# Altium PCB gen2.PcbDoc
Units mil, origin at the board's own origin, x right, y up, seen from the top; angles counter-clockwise.
Board outline 1377.95 x 1574.8 mil, 2 copper layers (Top Layer, Bottom Layer); 49 components, 41 nets, 242 pads, 74 vias.
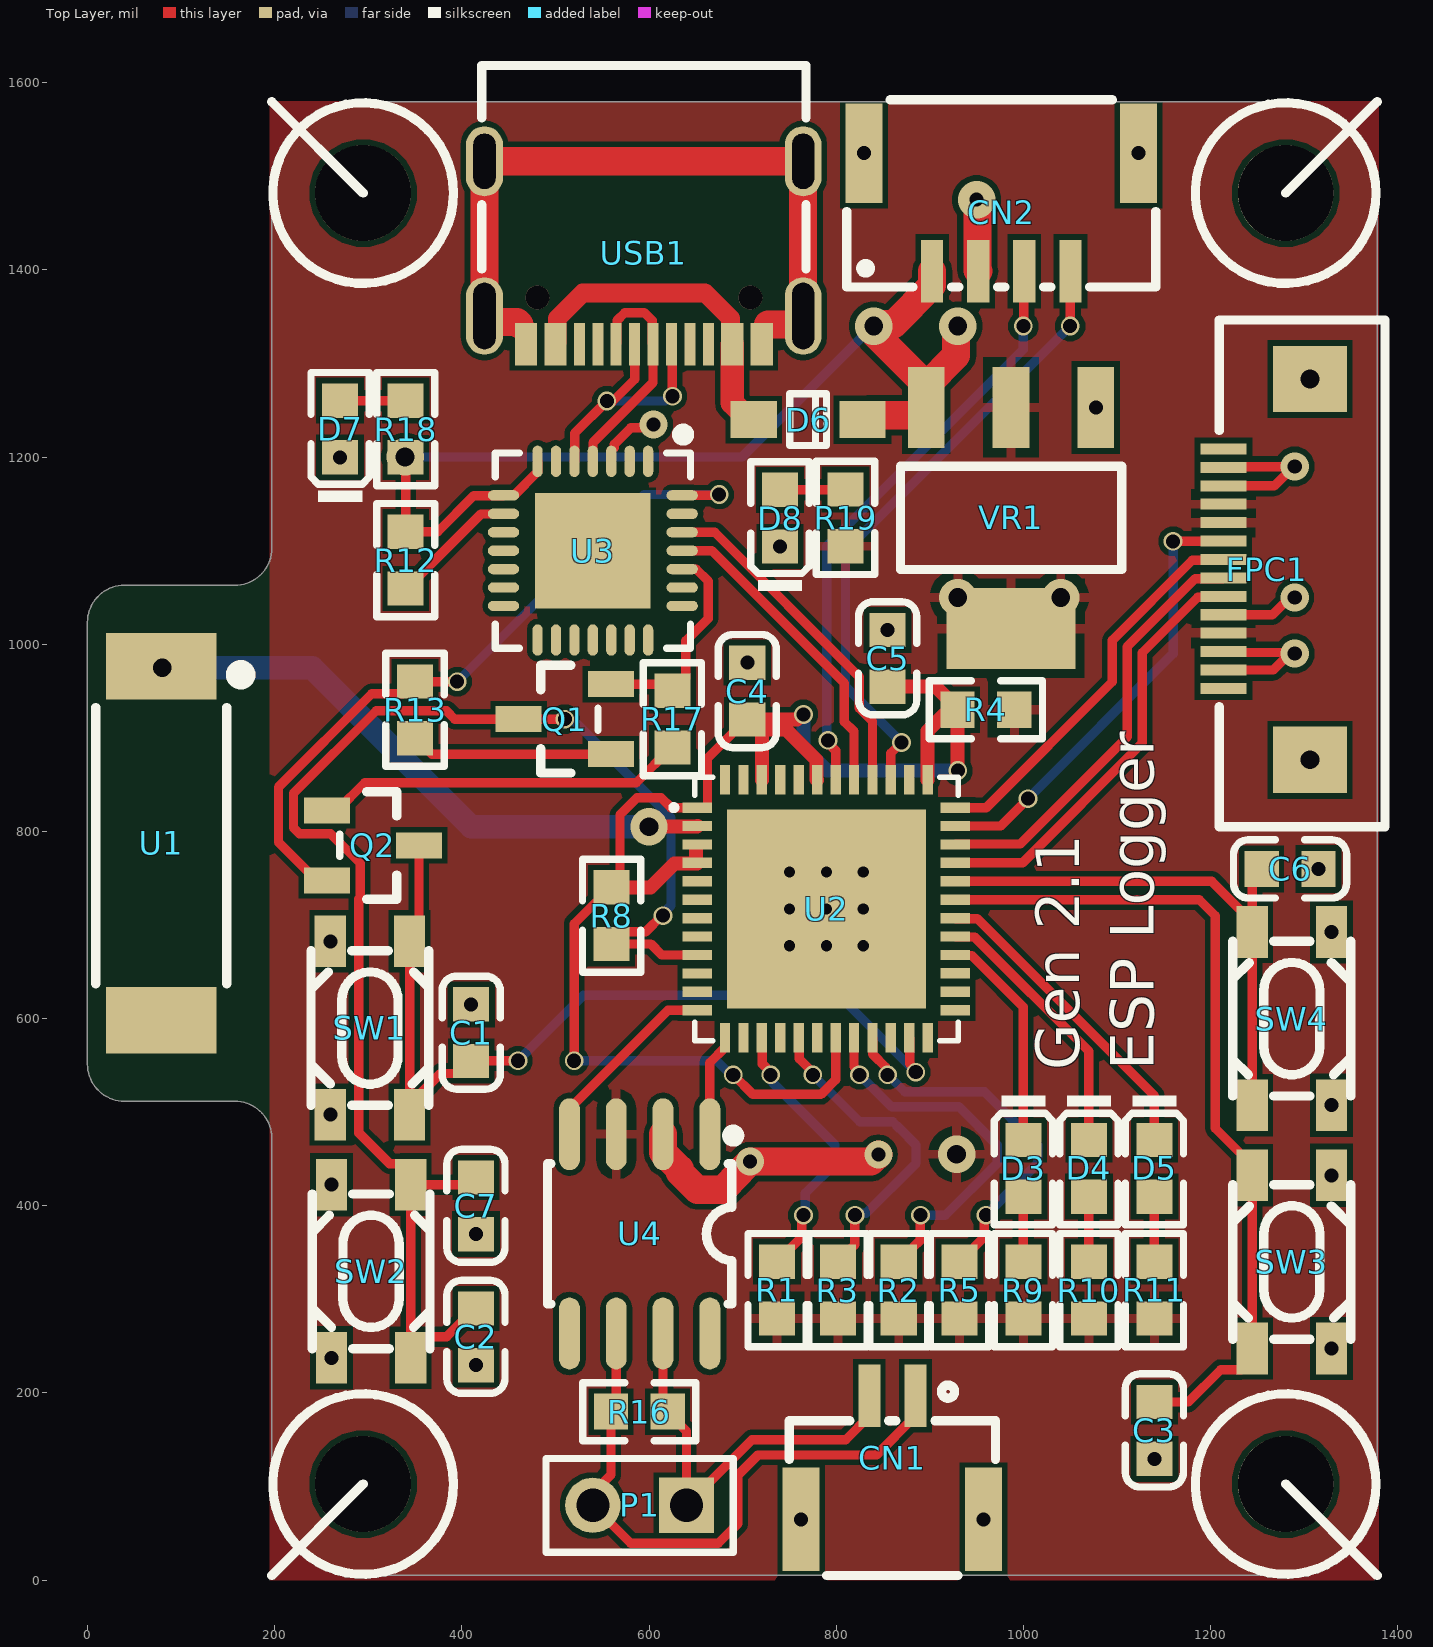
[diagram p0: Top Layer view]
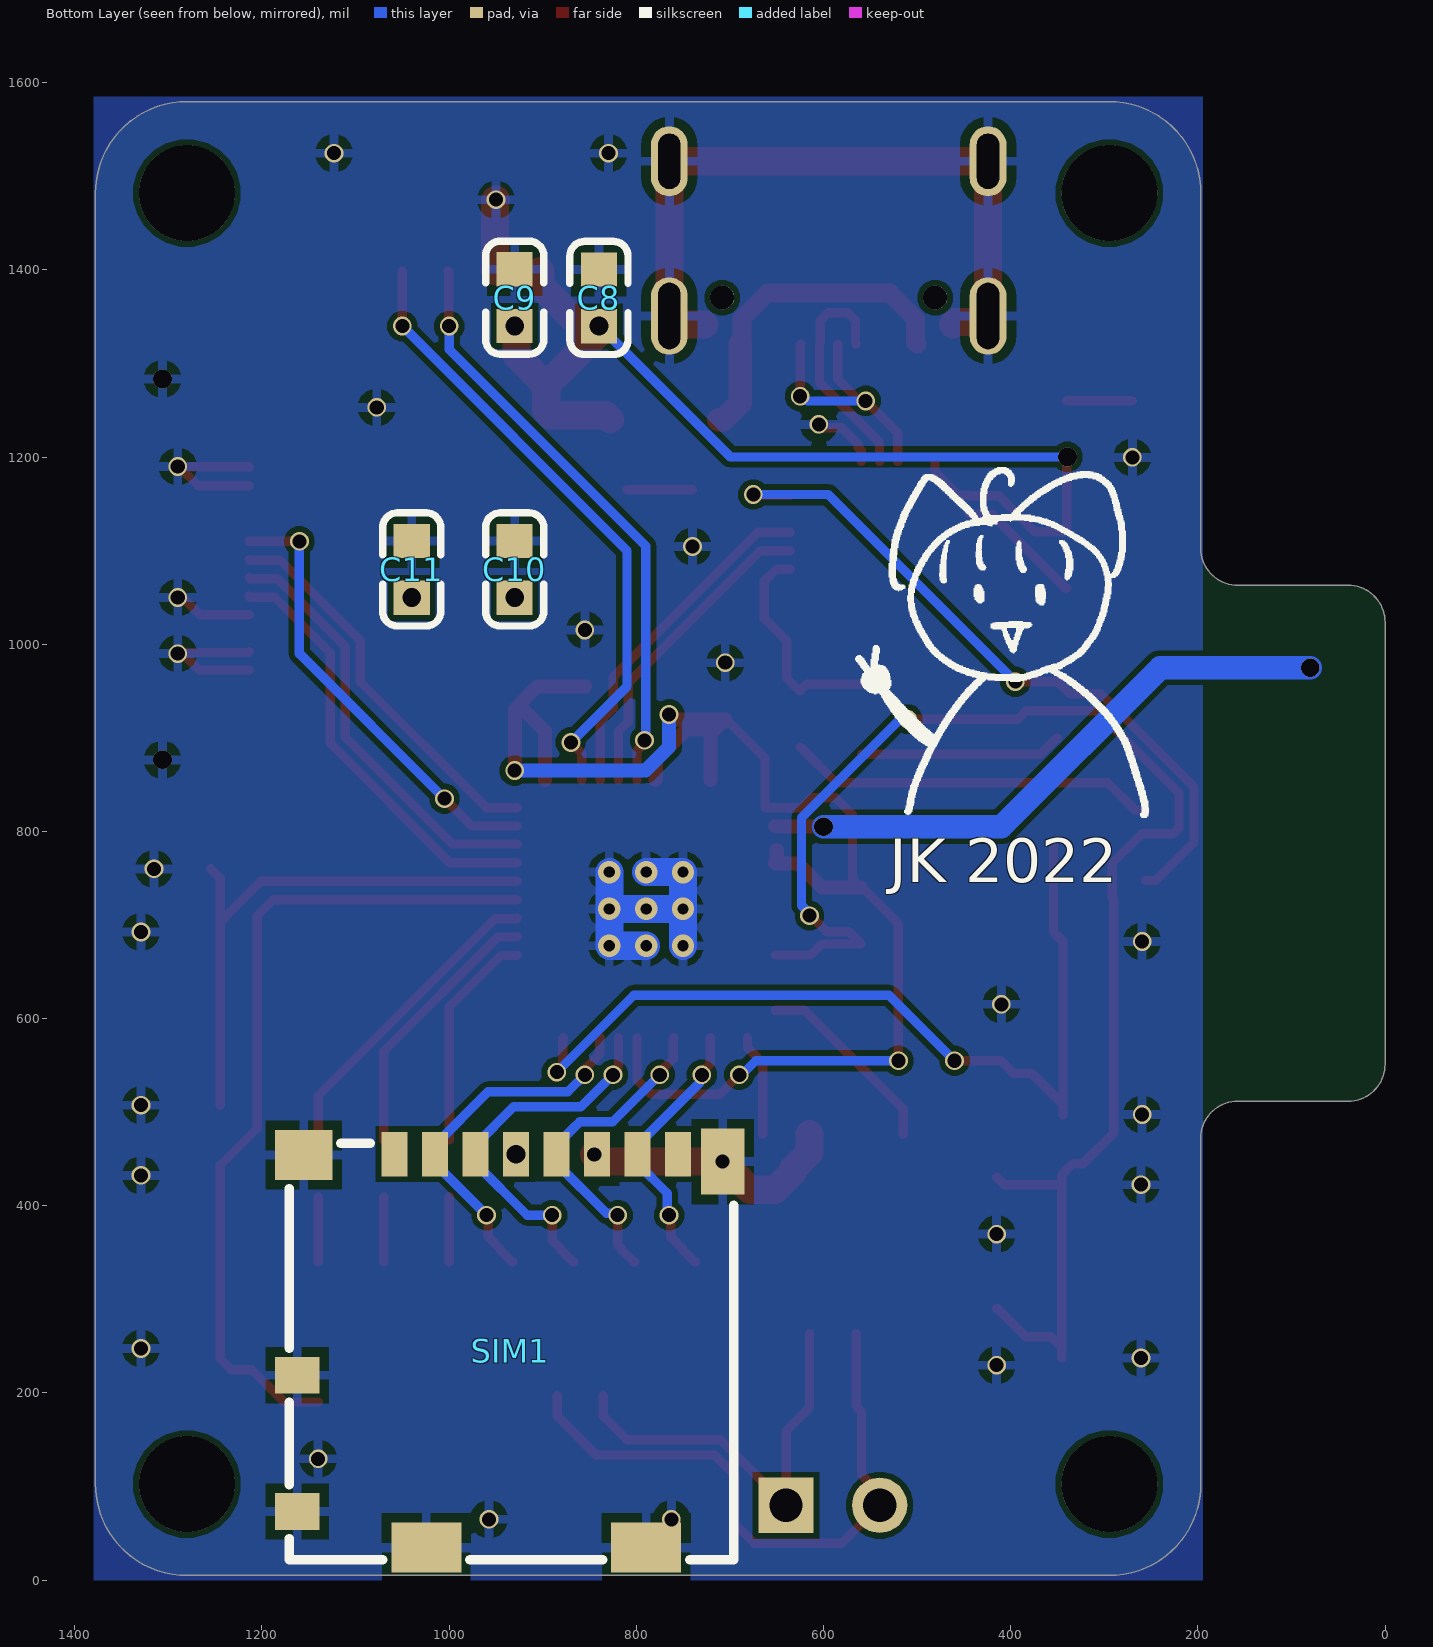
[diagram p1: Bottom Layer view, seen from below]
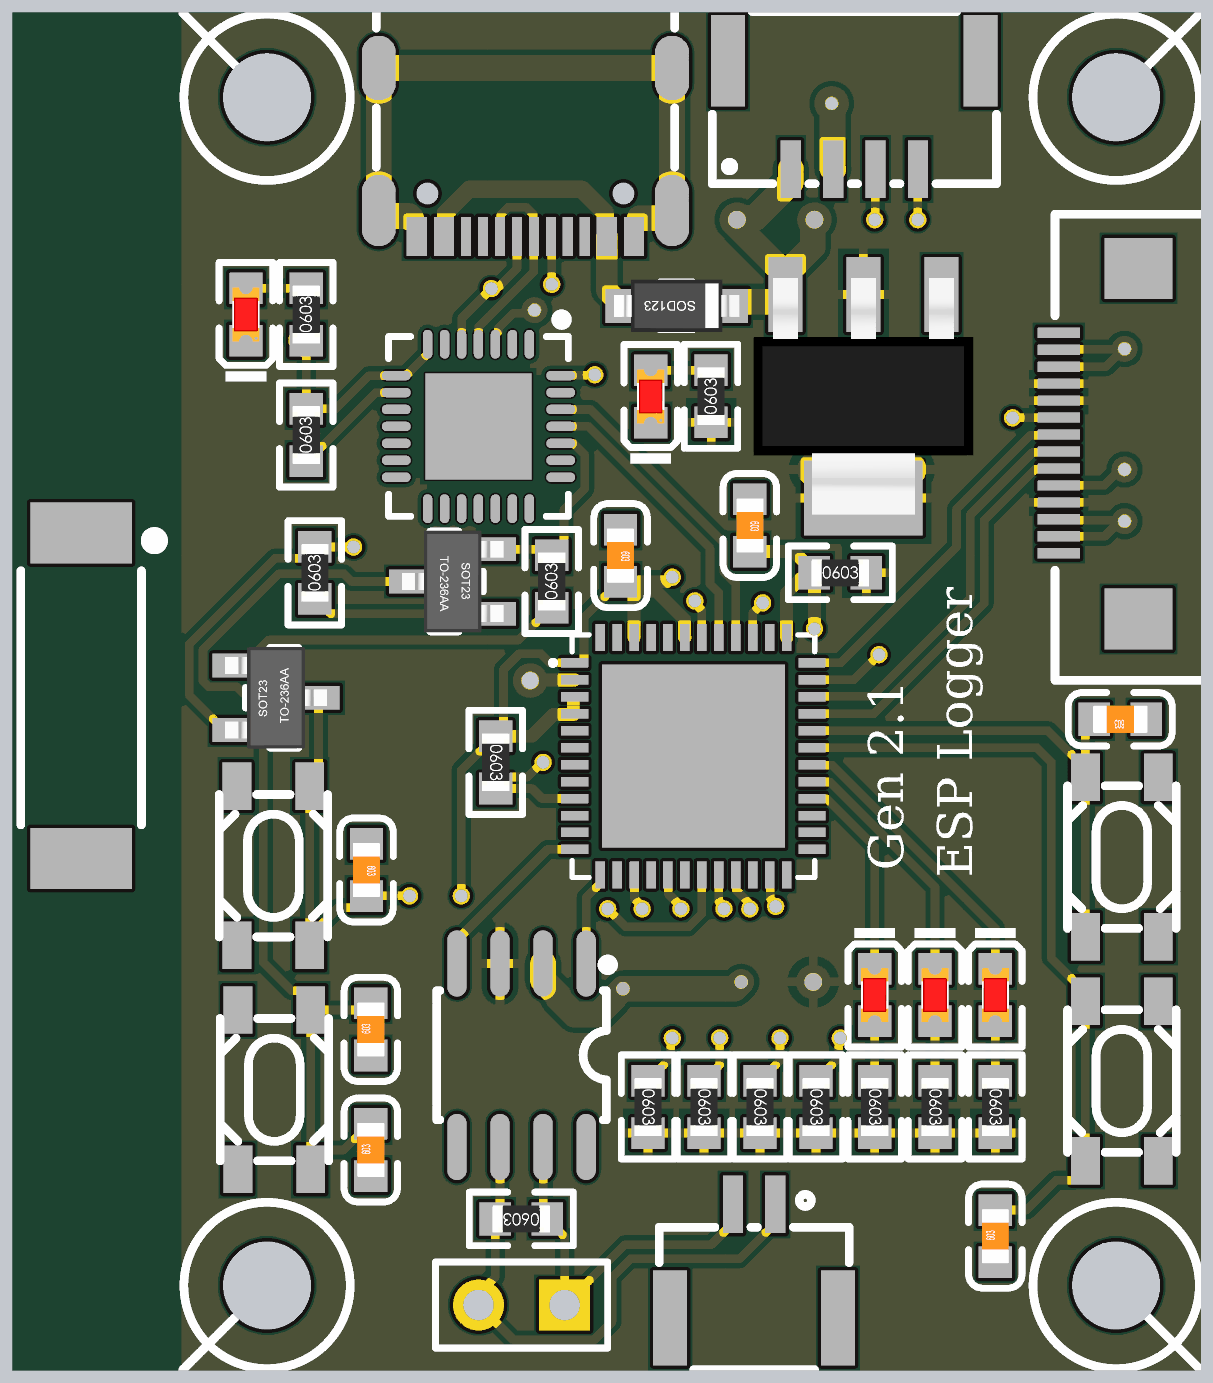
[diagram p2: 3D render of the assembled board from above, using the file's embedded part models]
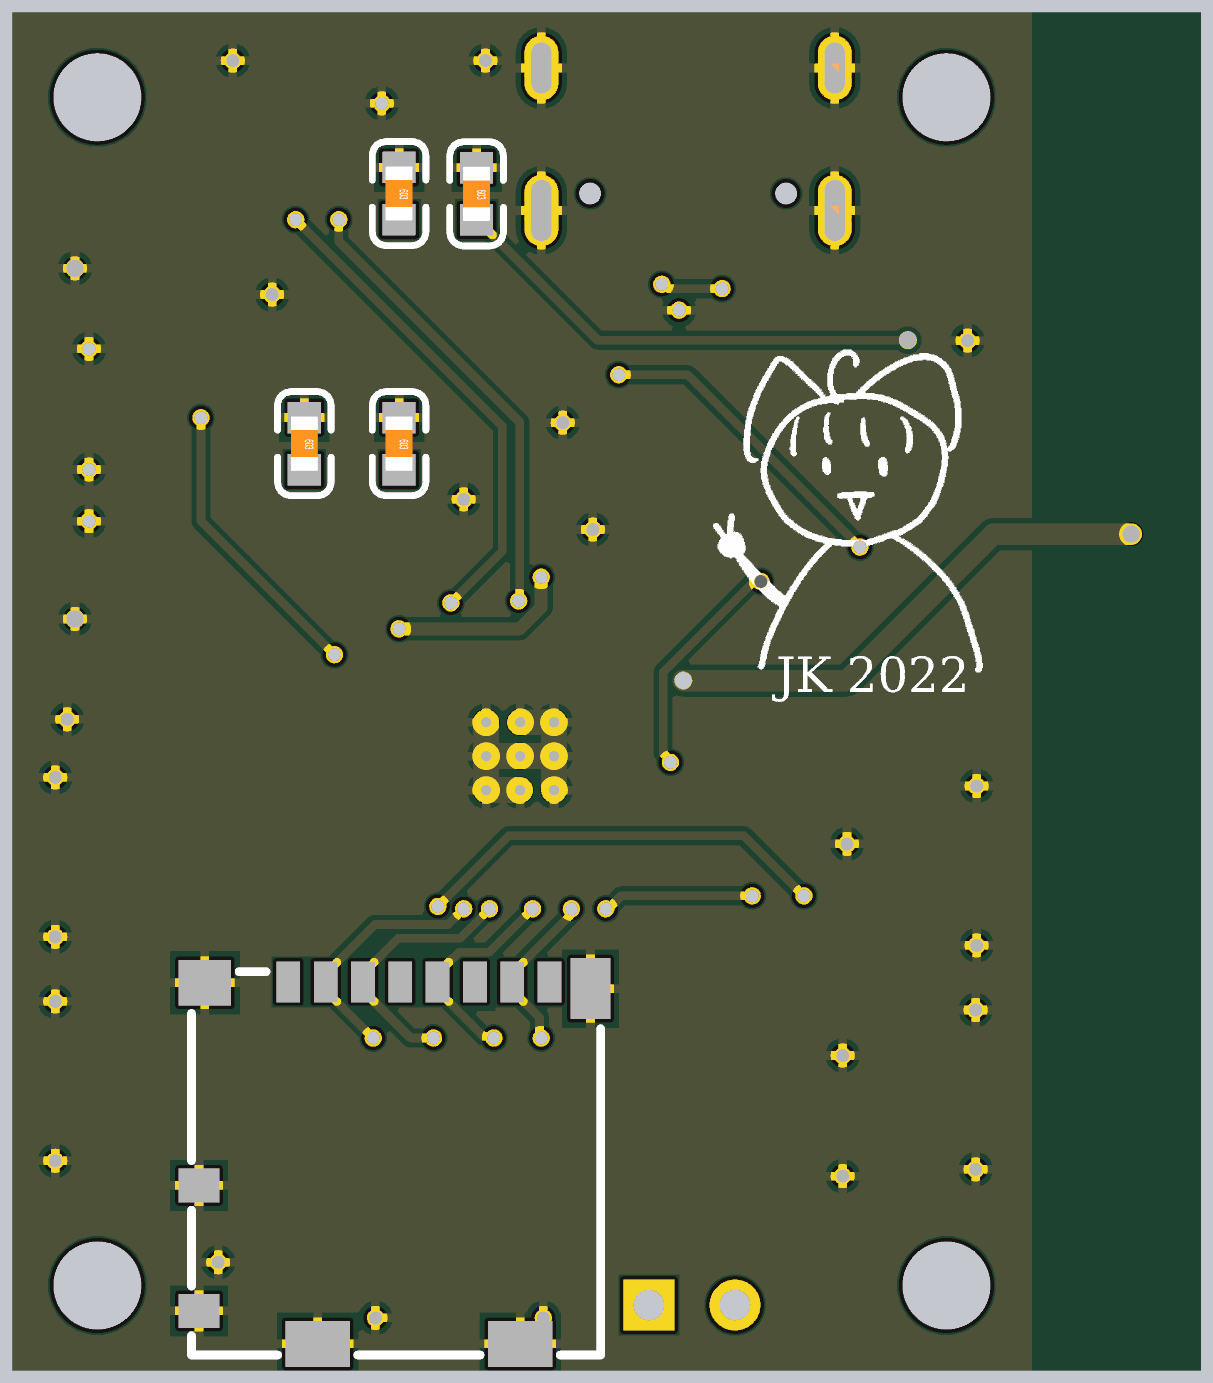
[diagram p3: 3D render of the assembled board from below, using the file's embedded part models]

## Layer stack, top to bottom
Top Solder: solder mask 0.4, Solder Resist, Dk 3.5
Top Layer: signal copper 1.4
Dielectric 1: dielectric 12.6, FR-4, Dk 4.8
Bottom Layer: signal copper 1.4
Bottom Solder: solder mask 0.4, Solder Resist, Dk 3.5

## Board outline
39.37,511.81 157.48,511.81 cw(c157.48,472.44) 196.85,472.44 196.85,103.43 ccw(c294.54,102.69) 295.28,5 1279.53,5 ccw(c1280.26,102.69) 1377.95,103.43 1377.95,1481.38 ccw(c1280.26,1482.11) 1279.53,1579.81 295.28,1579.81 ccw(c294.54,1482.11) 196.85,1481.38 196.85,1102.36 cw(c157.48,1102.36) 157.48,1062.99 39.37,1062.99 ccw(c39.37,1023.62) 0,1023.62 0,551.18 ccw(c39.37,551.18)

## Design rules (kind name [scope] priority, off if disabled: settings)
Clearance [All] p1: gap=6 ignorepadtopadclearanceinfootprint=FALSE
HoleSize [All] p1: absolutevalues=TRUE maxlimit=99999 minlimit=11.81 maxpercent=80.000 minpercent=20.000
HoleToHoleClearance [All] p1: gap=6 allowstackedmicrovias=TRUE
MinimumSolderMaskSliver [All] p1: minsoldermaskwidth=-1
PolygonConnect [All] p1: connectstyle=Relief reliefconductorwidth=10 reliefentries=4 polygonreliefangle="90 Angle" airgapwidth=10
RoutingVias [All] p1: holewidth=10 width=20 viastyle="Through Hole" minholewidth=10 minwidth=20 maxholewidth=40 maxwidth=80
SilkToSilkClearance [All] p1: silktosilkclearance=-1
SilkToSolderMaskClearance [IsPad] p1: minsilkscreentomaskgap=-1 clearancetoexposedcopper=TRUE
SolderMaskExpansion [All] p1: expansion=4 istentingtop=FALSE
Width [All] p1: maxlimit=100 minlimit=10 preferedwidth=10
25 further rules are at their usual default settings.

## Components (designator, comment, footprint, x,y, rotation, side; value= is the part's Value field where it differs from the comment)
C1 "100nF (104) 10% 50V" 0603_C 410,585 r270 top
C2 "100nF (104) 10% 50V" 0603_C 415,260 r90 top
C3 "100nF (104) 10% 50V" 0603_C 1140,160 r90 top
C4 "10uF" 0603_C 705,950 r270 top
C5 "100nF" 0603_C 855,985 r270 top
C6 "100nF (104) 10% 50V" 0603_C 1285,760 r180 top
C7 "100nF" 0603_C 415,400 r90 top
C8 "100nF" 0603_C 840,1370 r270 bottom
C9 "10uF" 0603_C 930,1370.32 r270 bottom
C10 "10uF" 0603_C 930,1080 r270 bottom
C11 "100nF" 0603_C 1040,1080 r270 bottom
CN1 "M1257VS-02P" CONN-SMD_P1.25_M1257VS-02P 860,130.98 r0 top
CN2 "M1257RS-04P" CONN-SMD_M1257RS-04P 976.38,1461.69 r180 top
D3 "红灯 0603" 0603_LED_S1 1000,440 r270 top
D4 "黄灯 0603" 0603_LED_S1 1070,440 r270 top
D5 "绿灯 0603" 0603_LED_S1 1140,440 r270 top
D6 "B5819W  SL" SOD-123 770,1240 r180 top
D7 "红灯 0603" 0603_LED_S1 270,1230 r90 top
D8 "红灯 0603" 0603_LED_S1 740,1134.68 r90 top
FPC1 "F0502WR-S-14PNLNG1G00L" FPC-SMD_P0.50-14P_F0500WR-S 1260,1080 r270 top
P1 "Header 2" HDR1X2 640,80 r180 top
Q1 "MMBT5551  G1" SOT-23(SOT-23-3) 510,920 r0 top
Q2 "MMBT5551  G1" SOT-23(SOT-23-3) 305,785 r180 top
R1 "10KΩ (1002) ±1%" 0603_R 736.85,310 r270 top
R2 "10KΩ (1002) ±1%" 0603_R 866.85,310 r270 top
R3 "10KΩ (1002) ±1%" 0603_R 801.85,310 r270 top
R4 "0Ω (0R0) ±1%" 0603_R 960,930 r0 top
R5 "10KΩ (1002) ±1%" 0603_R 931.85,310 r270 top
R8 "10KΩ (1002) ±1%" 0603_R 560,710 r270 top
R9 "1KΩ" 0603_R 1000,310 r270 top
R10 "1KΩ" 0603_R 1070,310 r270 top
R11 "1KΩ" 0603_R 1140,310 r270 top
R12 "10KΩ (1002) ±1%" 0603_R 340,1090 r90 top
R13 "12KΩ (1202) ±1%" 0603_R 350,930 r90 top
R16 "120Ω (1200) ±1%" 0603_R 589.69,180 r180 top
R17 "12KΩ (1202) ±1%" 0603_R 625,920 r90 top
R18 "1KΩ (1001) ±1%" 0603_R 340,1230 r90 top
R19 "1KΩ (1001) ±1%" 0603_R 810,1135 r90 top
SIM1 "MicroSD Socket" SIM-SMD_8P-1040310811 935,245 r0 bottom
SW1 "TS-1145A-B-A" SW-SMD_4P-L4.2-W3.2-P2.15-LS5.2 301.85,590 r180 top
SW2 "TS-1145A-B-A" SW-SMD_4P-L4.2-W3.2-P2.15-LS5.2 302.99,330 r180 top
SW3 "TS-1145A-B-A" SW-SMD_4P-L4.2-W3.2-P2.15-LS5.2 1286.85,340 r0 top
SW4 "TS-1145A-B-A" SW-SMD_4P-L4.2-W3.2-P2.15-LS5.2 1286.85,600 r0 top
U1 "AN1003" ANT-SMD_L10.3-W3.0 78.74,787.4 r270 top
U2 "ESP32-PICO-D4" QFN-48_L7.0-W7.0-P0.50-BL-EP5.4 789.52,717.2 r270 top
U3 "CP2102-GMR" QFN-28_5x5x05P 540,1100 r180 top
U4 "SN65HVD232DR" SOIC-8_L5.0-W4.0-P1.27-LS6.0-BL 590,370 r180 top
USB1 "TYPEC-304J-BCP16" USB-C-SMD_TYPEC-304J-BCP16 594.49,1418.39 r180 top
VR1 "AMS1117-3.3" SOT-223 986.85,1135 r90 top

## Footprints (in the part's own frame and the unit in brackets; to place one, negate y for a bottom-side part, rotate by r counter-clockwise, add the part's x,y. Pads: shape width x height; smd on the part's side, far side on the other; paste and mask are expansions set on the pad)
0603_C [mm]
  rect 0.93x0.98 smd: 1(-0.77,0) 2(0.77,0)
  silkscreen extent -1.53,-0.79 1.54,0.79, body extent -0.8,-0.4 0.8,0.4, height 0.3
0603_LED_S1 [mm]
  rect 0.93x0.98 smd: A(0.77,0) K(-0.77,0)
  silkscreen extent -1.98,-0.79 1.54,0.79, body extent -0.8,-0.4 0.8,0.4, height 0.6
0603_R [mm]
  rect 0.93x0.98 smd: 1(-0.77,0) 2(0.77,0)
  silkscreen extent -1.53,-0.79 1.54,0.79, body extent -0.85,-0.4 0.85,0.4, height 0.56
ANT-SMD_L10.3-W3.0 [mm]
  rect 1.8x3 smd: 1(-4.8,0) 2(4.8,0)
  silkscreen extent -4.77,-1.78 3.81,2.36
CONN-SMD_M1257RS-04P [mm]
  rect 0.6x1.7 smd: 1(1.875,1.6) 2(0.625,1.6) 3(-0.625,1.6) 4(-1.875,1.6)
  rect 1x2.7 smd: 5(-3.725,-1.6) 6(3.725,-1.6)
  silkscreen extent -4.19,-3.05 4.19,2.03
CONN-SMD_P1.25_M1257VS-02P [mm]
  rect 0.6x1.7 smd: 1(0.625,1.675) 2(-0.625,1.675)
  rect 1x2.8 smd: 3(-2.475,-1.675) 4(2.475,-1.675)
  silkscreen extent -2.8,-3.2 2.8,1.97
FPC-SMD_P0.50-14P_F0500WR-S [mm]
  rect 0.3x1.25 smd: 1(3.231,-1.175) 2(2.731,-1.175) 3(2.231,-1.175) 4(1.731,-1.175) 5(1.231,-1.175) 6(0.731,-1.175) 7(0.231,-1.175) 8(-0.269,-1.175) 9(-0.769,-1.175) 10(-1.269,-1.175) 11(-1.769,-1.175) 12(-2.269,-1.175) 13(-2.769,-1.175) 14(-3.269,-1.175)
  rect 1.8x2 smd: 15(5.169,1.175) 16(-5.169,1.175)
  silkscreen extent -6.77,-1.29 6.98,3.21
HDR1X2 [mm] "Connector; Header; 2 Position"
  rect 1.5x1.5 hole 0.9: 1(0,0)
  round 1.5 hole 0.9: 2(2.54,0)
  silkscreen extent -1.27,-1.27 3.81,1.27
QFN-28_5x5x05P [mm]
  rect 3.13x3.13 smd mask+0.051: 0(0,0)
  oval 0.28x0.85 smd mask+0.051: 1(-1.5,-2.425) 2(-1,-2.425) 3(-0.5,-2.425) 4(0,-2.425) 5(0.5,-2.425) 6(1,-2.425) 7(1.5,-2.425) 15(1.5,2.425) 16(1,2.425) 17(0.5,2.425) 18(0,2.425) 19(-0.5,2.425) 20(-1,2.425) 21(-1.5,2.425)
  oval 0.85x0.28 smd mask+0.051: 8(2.425,-1.5) 9(2.425,-1) 10(2.425,-0.5) 11(2.425,0) 12(2.425,0.5) 13(2.425,1) 14(2.425,1.5) 22(-2.425,1.5) 23(-2.425,1) 24(-2.425,0.5) 25(-2.425,0) 26(-2.425,-0.5) 27(-2.425,-1) 28(-2.425,-1.5)
  silkscreen extent -2.65,-3.3 2.65,2.65
QFN-48_L7.0-W7.0-P0.50-BL-EP5.4 [mm]
  rect 0.28x0.8 smd: 1(-2.75,-3.5) 2(-2.25,-3.5) 3(-1.75,-3.5) 4(-1.25,-3.5) 5(-0.75,-3.5) 6(-0.25,-3.5) 7(0.25,-3.5) 8(0.75,-3.5) 9(1.25,-3.5) 10(1.75,-3.5) 11(2.25,-3.5) 12(2.75,-3.5) 25(2.75,3.5) 26(2.25,3.5) 27(1.75,3.5) 28(1.25,3.5) 29(0.75,3.5) 30(0.25,3.5) 31(-0.25,3.5) 32(-0.75,3.5) 33(-1.25,3.5) 34(-1.75,3.5) 35(-2.25,3.5) 36(-2.75,3.5)
  rect 0.8x0.28 smd: 13(3.5,-2.75) 14(3.5,-2.25) 15(3.5,-1.75) 16(3.5,-1.25) 17(3.5,-0.75) 18(3.5,-0.25) 19(3.5,0.25) 20(3.5,0.75) 21(3.5,1.25) 22(3.5,1.75) 23(3.5,2.25) 24(3.5,2.75) 37(-3.5,2.75) 38(-3.5,2.25) 39(-3.5,1.75) 40(-3.5,1.25) 41(-3.5,0.75) 42(-3.5,0.25) 43(-3.5,-0.25) 44(-3.5,-0.75) 45(-3.5,-1.25) 46(-3.5,-1.75) 47(-3.5,-2.25) 48(-3.5,-2.75)
  rect 5.4x5.4 smd: 49(0,0)
  silkscreen extent -3.58,-4.21 3.58,3.58
SIM-SMD_8P-1040310811 [mm]
  rect 0.7x1.2 smd: 1(3.138,-5.338) 2(2.038,-5.338) 3(0.938,-5.338) 4(-0.162,-5.338) 5(-1.262,-5.338) 6(-2.362,-5.338) 7(-3.462,-5.338) 8(-4.562,-5.337)
  rect 1.17x1.8 smd: 9(-5.772,-5.138)
  rect 1.55x1.35 smd: 10(5.598,-5.312)
  rect 1.2x1 smd: 11(5.773,0.663) 12(5.773,4.363)
  rect 1.9x1.35 smd: 13(2.273,5.338) 14(-3.697,5.338)
  silkscreen extent -6.07,-5.64 5.99,5.67
SOD-123 [mm]
  rect 1.25x1 smd: 1(1.475,0) 2(-1.475,0)
  silkscreen extent -0.5,-0.7 0.5,0.7, body extent -1.85,-0.77 1.85,0.78, height 1.35
SOIC-8_L5.0-W4.0-P1.27-LS6.0-BL [mil]
  oval 22.38x76.78 smd: 1(-75,-106.5) 2(-25,-106.5) 3(25,-106.5) 4(75,-106.5) 5(75,106.5) 6(25,106.5) 7(-25,106.5) 8(-75,106.5)
  silkscreen extent -106,-111 98,75
SOT-23(SOT-23-3) [mm]
  rect 1.25x0.7 smd: 1(1.25,-0.95) 2(1.25,0.95) 3(-1.25,0)
  silkscreen extent -0.65,-1.46 0.9,1.46, body extent -1.5,-1.5 1.5,1.5, height 1.3
SOT-223 [mm]
  rect 2.2x1 smd: 1(3,-2.3) 2(3,0) 3(3,2.3)
  rect 2.2x3.5 smd: 2(-3,0)
  silkscreen extent -1.4,-3 1.4,3, body extent -3.49,-3.24 3.49,3.24, height 1.64
SW-SMD_4P-L4.2-W3.2-P2.15-LS5.2 [mm]
  rect 0.85x1.4 smd: 1(1.075,2.35) 2(1.075,-2.35) 3(-1.075,2.35) 4(-1.075,-2.35)
  silkscreen extent -1.6,-2.1 1.6,2.1
USB-C-SMD_TYPEC-304J-BCP16 [mm]
  oval 1x2.1 hole 0.6 slot 1.8 at 90 deg: 13(-4.325,1.719) 14(4.325,1.719)
  oval 1x1.9 hole 0.6 slot 1.5 at 90 deg: 15(-4.325,-2.481) 16(4.325,-2.481)
  rect 0.6x1.15 smd: A1B12(-3.2,2.481) A4B9(-2.4,2.481) B1A12(3.2,2.481) B4A9(2.4,2.481)
  rect 0.3x1.15 smd: A5(-1.25,2.481) A6(-0.25,2.481) A7(0.25,2.481) A8(1.25,2.481) B5(1.75,2.481) B6(0.75,2.481) B7(-0.75,2.481) B8(-1.75,2.481)
  round 0.65 hole 0.65 unplated: ""(-2.89,1.219) ""(2.89,1.219)
  silkscreen extent -4.4,-5.08 4.4,0.44

## Part data
C1 C2 C3 C5 C6 C7 C8 C11: library part "0603 100nF (104) 10% 50V", "贴片电容", Package=0603, SuppliersPartNumber=C14663, ComponentLink1Description=供应商链接, ComponentLink1URL=http://www.szlcsc.com/product/details_15331.html, Supplier=LC
C4 C9 C10: library part "0603 10uF (106) 10% 10V", "贴片电容", Package=0603, SuppliersPartNumber=C19702, ComponentLink1Description=供应商链接, ComponentLink1URL=http://www.szlcsc.com/product/details_20411.html, Supplier=LC
CN1 CN2: BOM_JLCPCB Part Class="Extended Part", BOM_Manufacturer=XFCN, BOM_Supplier=LCSC, Contributor=LCSC, spicePre=C
  CN1: BOM_Manufacturer Part=M1257VS-02P, BOM_Supplier Part=C541819, spiceSymbolName=M1257VS-02P
  CN2: BOM_Manufacturer Part=M1257RS-04P, BOM_Supplier Part=C541828, spiceSymbolName=M1257RS-04P
D3 D7 D8: library part "0603 红灯", "发光二极管", Package=0603, SuppliersPartNumber=C2286, ComponentLink1Description=供应商链接, ComponentLink1URL=http://www.szlcsc.com/product/details_2659.html, Supplier=LC
D4: library part "0603 黄灯", "发光二极管", Package=0603, SuppliersPartNumber=C72038, ComponentLink1Description=供应商链接, ComponentLink1URL=http://www.szlcsc.com/product/details_73147.html, Supplier=LC
D5: library part "0603 绿灯", "发光二极管", Package=0603, SuppliersPartNumber=C72043, ComponentLink1Description=供应商链接, ComponentLink1URL=http://www.szlcsc.com/product/details_73152.html, Supplier=LC
D6: library part "SOD-123 B5819W  SL", "肖特基二极管", Package=SOD-123, SuppliersPartNumber=C8598, ComponentLink1Description=供应商链接, ComponentLink1URL=http://www.szlcsc.com/product/details_9093.html, Supplier=LC
FPC1: BOM_JLCPCB Part Class="Extended Part", BOM_Manufacturer="Joint Tech Elec", BOM_Manufacturer Part=F0502WR-S-14PNLNG1G00L, BOM_Supplier=LCSC, BOM_Supplier Part=C247902, Contributor=LCSC, spicePre=F, spiceSymbolName=F0502WR-S-14PNLNG1G00L
P1: "Header, 2-Pin", LatestRevisionDate=17-Jul-2002, LatestRevisionNote="Re-released for DXP Platform.", Publisher="Altium Limited"
Q1 Q2: library part "SOT-23 MMBT5551  G1", "三极管", Package=SOT-23, SuppliersPartNumber=C2145, ComponentLink1Description=供应商链接, ComponentLink1URL=http://www.szlcsc.com/product/details_2502.html, Supplier=LC
R1 R2 R3 R5 R8 R12: library part "0603 10KΩ (1002) 1%", "贴片电阻", Package=0603, SuppliersPartNumber=C25804, ComponentLink1Description=供应商链接, ComponentLink1URL=http://www.szlcsc.com/product/details_26547.html, Supplier=LC
R4: library part "0603 0Ω (0R0) 1%", "贴片电阻", Package=0603, SuppliersPartNumber=C21189, ComponentLink1Description=供应商链接, ComponentLink1URL=http://www.szlcsc.com/product/details_21903.html, Supplier=LC
R9 R10 R11 R18 R19: library part "0603 1KΩ (1001) 1%", "贴片电阻", Package=0603, SuppliersPartNumber=C21190, ComponentLink1Description=供应商链接, ComponentLink1URL=http://www.szlcsc.com/product/details_21904.html, Supplier=LC
R13 R17: library part "0603 12KΩ (1202) 1%", "贴片电阻", Package=0603, SuppliersPartNumber=C22790, ComponentLink1Description=供应商链接, ComponentLink1URL=http://www.szlcsc.com/product/details_23517.html, Supplier=LC
R16: library part "0603 120Ω (1200) 1%", "贴片电阻", Package=0603, SuppliersPartNumber=C22787, ComponentLink1Description=供应商链接, ComponentLink1URL=http://www.szlcsc.com/product/details_23514.html, Supplier=LC
SIM1: library part 1040310811, BOM_JLCPCB Part Class="Extended Part", BOM_Manufacturer=MOLEX, BOM_Manufacturer Part=1040310811, BOM_Supplier=LCSC, BOM_Supplier Part=C585350, Contributor=LCSC, spicePre=S, spiceSymbolName=1040310811
SW1 SW2 SW3 SW4: BOM_JLCPCB Part Class="Extended Part", BOM_Manufacturer="XKB Enterprise", BOM_Manufacturer Part=TS-1145A-B-A, BOM_Supplier=LCSC, BOM_Supplier Part=C318904, Contributor=LCSC, spicePre=S, spiceSymbolName=TS-1145A-B-A
U1: BOM_JLCPCB Part Class="Extended Part", BOM_Manufacturer="Rainsun microwave Tech", BOM_Manufacturer Part=AN1003, BOM_Supplier=LCSC, BOM_Supplier Part=C239240, Contributor=LCSC, spicePre=U, spiceSymbolName=AN1003
U2: BOM_JLCPCB Part Class="Extended Part", BOM_Manufacturer="Espressif Systems", BOM_Manufacturer Part=ESP32-PICO-D4, BOM_Supplier=LCSC, BOM_Supplier Part=C193707, Contributor=LCSC, spicePre=U, spiceSymbolName=ESP32-PICO-D4
U3: library part CP2102-GMR_[C6568], "USB", Package=QFN-28_5x5x05P, SuppliersPartNumber=C6568, ComponentLink1Description=供应商链接, ComponentLink1URL=http://www.szlcsc.com/product/details_7033.html, Supplier=LC
U4: BOM_JLCPCB Part Class="Extended Part", BOM_Manufacturer=TI, BOM_Manufacturer Part=SN65HVD232DR, BOM_Supplier=LCSC, BOM_Supplier Part=C30530, spicePre=U, spiceSymbolName=SN65HVD232DR
USB1: BOM_JLCPCB Part Class="Extended Part", BOM_Manufacturer=XUNPU(讯普), BOM_Manufacturer Part=TYPEC-304J-BCP16, BOM_Supplier=LCSC, BOM_Supplier Part=C2835315, Contributor=LCSC, spicePre=U, spiceSymbolName=TYPEC-304J-BCP16
VR1: library part "SOT-223 AMS1117-3.3", "低压差线性稳压(LDO)", Package=SOT-223, SuppliersPartNumber=C6186, ComponentLink1Description=供应商链接, ComponentLink1URL=http://www.szlcsc.com/product/details_6652.html, Supplier=LC

## Free pads (board coordinates)
  round 102.36 hole 102.36 unplated: M(294.54,102.69) M(294.54,1482.11) M(1280.26,102.69) M(1280.26,1482.11)

## Via types
v1: diameter 30/20 (per signal layer), hole 15, Top Layer to Bottom Layer, 28 vias
v2: diameter 20/20 (per signal layer), hole 15, Top Layer to Bottom Layer, 26 vias
v3: diameter 24.02, hole 12, Top Layer to Bottom Layer, 9 vias
v4: diameter 40/20 (per signal layer), hole 20, Top Layer to Bottom Layer, tented both sides, 7 vias
v5: diameter 50/20 (per signal layer), hole 20, Top Layer to Bottom Layer, 2 vias
v6: diameter 40/20 (per signal layer), hole 20, Top Layer to Bottom Layer, 1 vias
v7: diameter 40/20 (per signal layer), hole 15, Top Layer to Bottom Layer, 1 vias

## Nets (pads, with @x,y where several pads share a name; then routed paths per layer and width w, separated by ;. In a path a pad name is that pad's centre, name@x,y a point inside that pad or via, vN(x,y) a via of type N, cw(c..) or ccw(c..) an arc to the next point about the centre after c; other vN are vias at no path point)
+3.3: C10.2 C11.2 FPC1.4 FPC1.10 FPC1.11 R1.2 R2.2 R3.2 R4.2 R5.2 R9.2 R10.2 R11.2 R19.1 SIM1.4 U4.3 VR1.2
  other v4: 928.6,455.14 930,1050 1040,1050
+3.3A: C4.2 C5.2 R4.1 R8.1 U2.1 U2.3 U2.4 U2.19 U2.37 U2.43 U2.46 | length 1639.6
  Top Layer w10: v2(520,555) 520,701.3 559.02,740.31 R8.1 569,749.31 569,817.84 587.16,836 612.84,836 623.36,825.48 U2.1 661.96,825.48 662.47,825.99 662.47,878.14 704.02,919.68 C4.2 ; v2(690,540) 711,519 783.7,519 799.37,534.67 U2.19 ; C4.2@715.81,908.88 718.31,906.38 C4.2@719.29,906.38
  Top Layer w15: R8.1 601.79,740.31 627.22,765.75 651.06,765.75 U2.4 650,768.14 650,780 ; C4.2@719.29,906.38 720.63,905.04 U2.46 ; v2(765,925) 763.65,925 758.33,919.68 C4.2 715.81,908.88 746.47,908.88 779.01,876.34 779.01,855.68 U2.43 ; C5.2 905.98,954.68 929.69,930.98 R4.1 929.84,929.84 929.84,865.16 v2(930,865) ; U2.37 897.8,907.13 R4.1@919.69,929.02
  Bottom Layer w10: v2(520,555) 672.29,555 687.29,540 v2(690,540)
  Bottom Layer w15: v2(765,925) 765,890.35 790.35,865 v2(930,865)
+5: C8.2 C9.2 CN2.1 D6.2 R12.2 R18.1 U3.7 U3.8 VR1.3 | length 1175.7
  Top Layer w10: R18.1 R12.2 374.29,1120.32 412.84,1158.86 444.33,1158.86 U3.8 455.75,1159.06 480.94,1184.25 U3.7
  Top Layer w30: D6.2 832.76,1244.68 891.61,1244.68 896.3,1249.37 VR1.3 VR1.3@896.3,1276.73 ; CN2.1 902.56,1383.43 861.05,1341.91 841.91,1341.91 v4(840,1340) 841.91,1338.09 841.91,1331.12 VR1.3@896.3,1276.73 ; v4(930,1340) 928.09,1338.09 928.09,1308.52 VR1.3@896.3,1276.73
  Bottom Layer w10: v4(339.34,1200.16) 699.49,1200.16 839.33,1340 v4(840,1340)
BTN1: C3.2 SW3.3 SW3.4 U2.31 | length 898.2
  Top Layer w10: U2.31 1187.95,727.05 1205,710 1205,482.88 1244.53,443.35 SW3.3 SW3.4 1244.53,236.66 1232.79,224.93 1210.85,224.93 1176.24,190.31 C3.2
BTN2: C6.2 SW4.3 SW4.4 U2.32 | length 591.9
  Top Layer w10: U2.32 1201.14,746.74 SW4.3@1244.53,703.35 ; SW4.4 SW4.3 SW4.3@1244.53,703.35 ; C6.2 1244.53,749.84 SW4.3@1244.53,703.35
CAN_H: CN1.2 P1.1 R16.1 U4.7 | length 450.4
  Top Layer w10: U4.7 615,185 R16.1 620,179.02 640,159.02 P1.1 710,150 810.12,150 835.39,175.27 CN1.2
CAN_L: CN1.1 P1.2 R16.2 U4.6 | length 663.6
  Top Layer w10: U4.6 565,185.63 R16.2 559.37,112.64 540,93.27 P1.2 580.53,39.47 674.08,39.47 695,60.39 695,112.37 716.38,133.75 843.08,133.75 884.61,175.27 CN1.1
CAN_Rx: U2.12 U4.4 | length 207.5
  Top Layer w10: U4.4 515,503.7 620.24,608.94 U2.12
CAN_Tx: U2.13 U4.1 | length 109.6
  Top Layer w10: U4.1 665,552.91 681.26,569.17 U2.13
D+: U3.4 USB1.A6 USB1.B6 | length 247.7
  Top Layer w10: U3.4 540.2,1195.67 540.2,1215.5 604.33,1279.63 USB1.A6 603.42,1321.6 603.42,1346.02 595.11,1354.33 574.19,1354.33 565.86,1346.01 565.86,1321.6 USB1.B6
D-: U3.5 USB1.A7 USB1.B7 | length 278.4
  Top Layer w10: U3.5 520.51,1195.67 520.51,1225.51 v2(555,1260) ; v2@560.8,1259.2 584.65,1283.05 USB1.A7 ; USB1.B7 624.92,1319.79 624.92,1290.08 625,1290 v2(625,1265)
  Bottom Layer w10: v2(555,1260) 617.29,1260 622.29,1265 v2(625,1265)
DTR: Q2.2 R13.2 U3.28 | length 768
  Top Layer w10: Q2.2 244.96,747.6 204.18,788.38 204.18,847.36 303.82,947.01 336.69,947.01 R13.2 350.32,960 v2(395,960) ; U3.28 635.67,1159.25 674.25,1159.25 v2(675,1160)
  Bottom Layer w10: v2(395,960) 595,1160 v2(675,1160)
EN: C2.2 C7.2 Q1.3 R8.2 SW2.3 SW2.4 U2.9 | length 1601.6
  Top Layer w10: SW2.3 SW2.3@345.31,248.3 ; C2.2 414.02,290.31 383.73,260.03 357.05,260.03 SW2.3@345.32,248.3 ; C7.2 407.2,422.52 SW2.4 ; v2(510,920) Q1.3 392.55,920 383.56,928.99 308.44,928.99 220.18,840.74 220.18,804.07 226.62,797.62 259.71,797.62 291.39,765.93 291.39,729.26 290,727.87 290,477.83 322.76,445.07 333.58,445.07 345.32,433.34 SW2.4 ; v2(615,710) 613.66,710 596.65,692.99 573.31,692.99 R8.2 602.04,679.68 613.73,668 U2.9 ; SW2.3@345.32,248.3 SW2.4
  Bottom Layer w10: v2(510,920) 511.91,918.09 520.15,918.09 623.5,814.73 623.5,720.86 615,712.36 v2(615,710)
GND: C1.1 C2.1 C3.1 C4.1 C5.1 C6.1 C7.1 C8.1 C9.1 C10.1 C11.1 CN1.3 CN1.4 CN2.2 CN2.5 CN2.6 D7.K D8.K FPC1.2 FPC1.3 FPC1.5 FPC1.12 FPC1.13 FPC1.15 FPC1.16 SIM1.6 SIM1.9 SIM1.10 SIM1.11 SIM1.12 SIM1.13 SIM1.14 SW1.1 SW1.2 SW2.1 SW2.2 SW3.1 SW3.2 SW4.1 SW4.2 U2.49 U3.3 U4.2 USB1.13 USB1.14 USB1.15 USB1.16 USB1.A1B12 USB1.B1A12 VR1.1 | length 1908.6
  Top Layer w10: U3.3 559.68,1206.97 562.86,1210.14 562.86,1213.53 580.5,1231.17 601.17,1231.17 v1(605,1235) ; FPC1.2 1267.08,972.49 1284.59,990 v1(1290,990) 1288.73,991.27 1214.64,991.27 FPC1.3 ; FPC1.5 1266.13,1031.54 1284.59,1050 v1(1290,1050) ; FPC1.12 1268.23,1169.34 v1@1288.4,1189.51 ; FPC1.13 1214.23,1189.51 v1@1288.4,1189.51 ; v1(1290,1190) 1288.89,1190 v1@1288.4,1189.51
  Top Layer w30: USB1.B1A12@461.69,1341.62 459.16,1344.16 428.54,1344.16 424.21,1348.49 USB1.14 USB1.16 USB1.15 USB1.13 764.77,1345.95 760.44,1341.62 USB1.A1B12@727.27,1341.62 ; U4.2 615,456.92 632.81,439.11 632.81,435.97 651.67,417.11 678.33,417.11 697.19,435.97 697.19,436.72 v1(707.74,447.26) 837.26,447.26 v1(845,455) ; v7(950,1475) 950.89,1474.11 950.89,1399.59 CN2.2
  Bottom Layer w30: v3(750.15,677.84) v3(750.15,717.21) ; v3(789.53,677.84) v3(828.9,677.83) v3(828.9,717.21) ; v3(789.53,756.58) v3(750.15,756.58) v3(750.15,717.21) ; v3(828.9,756.57) v3(828.9,717.21) ; v3(750.15,717.21) v3(789.53,717.21) v3(828.9,717.21)
  other v1: 762.56,65.04 957.44,65.03 1140,129.69 415,229.69 260.67,237.47 1329.17,247.48 415,369.69 260.67,422.52 1329.18,432.53 259.53,497.47 1329.17,507.48 410,615.32 259.53,682.52 1329.18,692.53 1315.32,760 705,980.32 855,1015.32 740,1104.37 270,1199.69 1077.4,1253.11 829.73,1524.69 1123.04,1524.69
  other v5: 1306.26,876.5 1306.26,1283.51
GPIO0: C1.2 Q2.3 SW1.3 SW1.4 U2.23 | length 954.4
  Top Layer w10: SW1.3 SW1.3@344.17,508.3 ; Q2.3 354.21,692.55 SW1.4 SW1.3@344.17,508.3 ; v2(460,555) 410.31,555 396.69,541.38 377.25,541.38 SW1.3@344.17,508.3 ; U2.23 878.62,578.9 878.62,551.84 885,545.47 v2(885,542.76)
  Bottom Layer w10: v2(460,555) 530,625 802.76,625 v2(885,542.76)
GPIO5: FPC1.7 U2.34 | length 460.9
  Top Layer w10: U2.34 927.83,786.62 996.62,786.62 1111,901 1111,997.5 1183.51,1070.01 1212.83,1070.01 FPC1.7
GPIO8: FPC1.6 U2.33 | length 460.9
  Top Layer w10: U2.33 999.05,766.42 1127,894.37 1127,990.87 1186.46,1050.33 1212.83,1050.33 FPC1.6
GPIO9: D3.K U2.28 | length 237.8
  Top Layer w10: U2.28 927.83,667.49 944.96,667.49 1000,612.44 D3.K
GPIO10: D4.K U2.29 | length 288.2
  Top Layer w10: U2.29 927.83,687.17 947.9,687.17 1070,565.07 D4.K
GPIO11: D5.K U2.30 | length 338.6
  Top Layer w10: U2.30 927.83,706.86 950.84,706.86 1140,517.7 D5.K
GPIO13: R2.1 SIM1.3 U2.20 | length 404.2
  Top Layer w10: U2.20 819.06,548.64 825,542.71 v2(825,540) ; R2.1 867.83,340.31 881.14,353.62 881.14,354.61 890,363.46 v2(890,390)
  Bottom Layer w10: v2(825,540) 859.24,505.76 931.13,505.76 971.91,464.98 SIM1.3 971.91,445.3 916.62,390 v2(890,390)
GPIO14: R3.1 SIM1.5 U2.17 | length 352.7
  Top Layer w10: U2.17 760.51,578.9 760.51,557.19 775,542.71 v2(775,540) ; R3.1 802.83,340.31 816.14,353.62 816.14,354.61 820,358.46 v2(820,390)
  Bottom Layer w10: v2(775,540) 825.24,489.76 860.33,489.76 867.09,483 867.28,483 885.3,464.98 SIM1.5 885.3,445.3 831.91,391.91 821.91,391.91 v2(820,390)
GPIO15: R5.1 SIM1.2 U2.21 | length 397.2
  Top Layer w10: U2.21 839.25,578.9 839.25,561.78 853.09,547.94 853.09,541.91 v2(855,540) ; R5.1 932.83,340.31 946.14,353.62 946.14,354.61 958.09,366.55 958.09,388.09 v2(960,390)
  Bottom Layer w10: v2(855,540) 873.24,521.76 958.44,521.76 1015.22,464.98 SIM1.2 1015.22,445.3 960,390.08 v2(960,390)
GPIO18: FPC1.9 U2.35 | length 482.8
  Top Layer w10: U2.35 975.79,805.79 v2(1005,835) ; v2(1160,1110) 1160.14,1110.14 1213.6,1110.14 FPC1.9
  Bottom Layer w10: v2(1005,835) 1160,990 v2(1160,1110)
GPIO23: FPC1.8 U2.36 | length 422.1
  Top Layer w10: U2.36 960.48,825.48 1095,960 1095,1004.13 1180.57,1089.7 1212.83,1089.7 FPC1.8
GPIO26: R1.1 SIM1.7 U2.15 | length 297.6
  Top Layer w10: U2.15 721.14,578.9 721.14,551.56 730,542.71 v2(730,540) ; R1.1 737.83,340.31 751.14,353.62 751.14,354.61 763.09,366.55 763.09,388.09 v2(765,390)
  Bottom Layer w10: v2(730,540) 731.91,538.09 731.91,531.75 798.68,464.98 SIM1.7 798.68,445.3 766.91,413.53 766.91,391.91 v2(765,390)
NetD3_A: D3.A R9.1 | length 69.4
  Top Layer w10: R9.1 D3.A
NetD4_A: D4.A R10.1 | length 69.4
  Top Layer w10: R10.1 D4.A
NetD5_A: D5.A R11.1 | length 69.4
  Top Layer w10: R11.1 D5.A
NetD6_1: D6.1 USB1.A4B9 USB1.B4A9 | length 357.3
  Top Layer w20: USB1.B4A9 501.81,1322.5 501.81,1348.08 529.06,1375.33 659.92,1375.33 687.17,1348.08 687.17,1322.5 USB1.A4B9
  Top Layer w25: USB1.A4B9 688.98,1258.03 707.01,1240 D6.1
NetD7_A: D7.A R18.2 | length 70
  Top Layer w10: D7.A R18.2
NetD8_A: D8.A R19.2 | length 70.1
  Top Layer w10: D8.A 809.68,1165 R19.2
NetQ1_1: Q1.1 R13.1 | length 216.3
  Top Layer w10: R13.1 350.98,899.69 368.07,882.6 Q1.1
NetQ2_1: Q2.1 R17.1 | length 397.1
  Top Layer w10: Q2.1 266.61,822.4 296.21,852 586.33,852 624.02,889.69 R17.1
NetR12_1: R12.1 U3.9 | length 137.5
  Top Layer w10: R12.1 340.98,1059.69 420.47,1139.17 444.33,1139.17 U3.9
NetU1_1: U1.1 U2.2 | length 642.5
  Top Layer w15: v4(600,805) 600.39,805.39 651.34,805.39 U2.2
  Bottom Layer w25: v6(80,975) 240,975 410,805 v4(600,805)
RTS: Q1.2 R17.2 U3.24 | length 235.3
  Top Layer w10: Q1.2 617.91,957.4 R17.2 625.98,950.32 639.29,963.62 639.29,1003.59 663.2,1027.5 663.2,1067.47 650.55,1080.12 635.67,1080.12 U3.24
U0Rx: U2.40 U3.26 | length 369.2
  Top Layer w10: U3.26 670.15,1119.68 824.71,965.12 824.71,931.82 838.74,917.79 U2.40
U0Tx: U2.41 U3.25 | length 339.6
  Top Layer w10: U3.25 667.2,1100 808.71,958.5 808.71,917.3 819.06,906.95 U2.41
U1Rx: CN2.4 U2.39 | length 672.7
  Top Layer w10: U2.39 858.43,883.43 869.87,894.87 v2(869.87,895.13) ; v2(1050,1340) 1050.1,1340.1 1050.1,1398.6 CN2.4
  Bottom Layer w10: v2(869.87,895.13) 810,955 810,1100 v2(1050,1340)
U1Tx: CN2.3 U2.42 | length 635
  Top Layer w10: v2(791.19,897.4) 791.19,894.69 799.37,886.51 U2.42 ; v2(1000,1340) 1000.49,1340.49 1000.49,1398.21 CN2.3
  Bottom Layer w10: v2(791.19,897.4) 790,898.59 790,1105 1000,1315 v2(1000,1340)
pads on no net: FPC1.1 FPC1.14 SIM1.1 SIM1.8 U1.2 U2.5 U2.6 U2.7 U2.8 U2.10 U2.11 U2.14 U2.16 U2.18 U2.22 U2.24 U2.25 U2.26 U2.27 U2.38 U2.44 U2.45 U2.47 U2.48 U3.0 U3.1 U3.2 U3.6 U3.10 U3.11 U3.12 U3.13 U3.14 U3.15 U3.16 U3.17 U3.18 U3.19 U3.20 U3.21 U3.22 U3.23 U3.27 U4.5 U4.8 USB1. USB1.A5 USB1.A8 USB1.B5 USB1.B8

## Polygon pours and split planes (outlines as drawn)
GND on Bottom Layer "GND_L02_P001" (solid, pour order 1): 195,1585 1380,1585 1380,0 195,0
+3.3 on Top Layer "+3.3_L01_P000" (solid, remove dead copper, pour order 0): 195,1580 1380,1580 1380,5 1375,0 195,0

## Silkscreen, mask and mechanical layers (free items; w line width, h text height)
Top Overlay:
  circle w10: c1280.26,1482.11 r96.51
  circle w10: c294.54,1482.11 r96.51
  circle w10: c1280.26,102.69 r96.51
  circle w10: c294.54,102.69 r96.51
  lines w10: 196.85,5 294.54,102.69 ; 196.85,1579.8 294.54,1482.11 ; 1280.26,102.69 1377.95,5 ; 1280.26,1482.11 1377.95,1579.8
  text "Gen 2.1" at 1075,545 h80 r90
  text "ESP Logger" at 1155,545 h80 r90
Bottom Overlay:
  drawing of 8 lines, arcs and shapes, not listed
  text "JK 2022" at 530,730 h80
Mechanical 1:
  the board outline again, w10